# Altium PCB preamp_pcb.PcbDoc
Units mil, origin at the board's own origin, x right, y up, seen from the top; angles counter-clockwise.
Board outline 6000 x 4000 mil, 2 copper layers (Top Layer, Bottom Layer); 23 components, 17 nets, 72 pads, 0 vias.
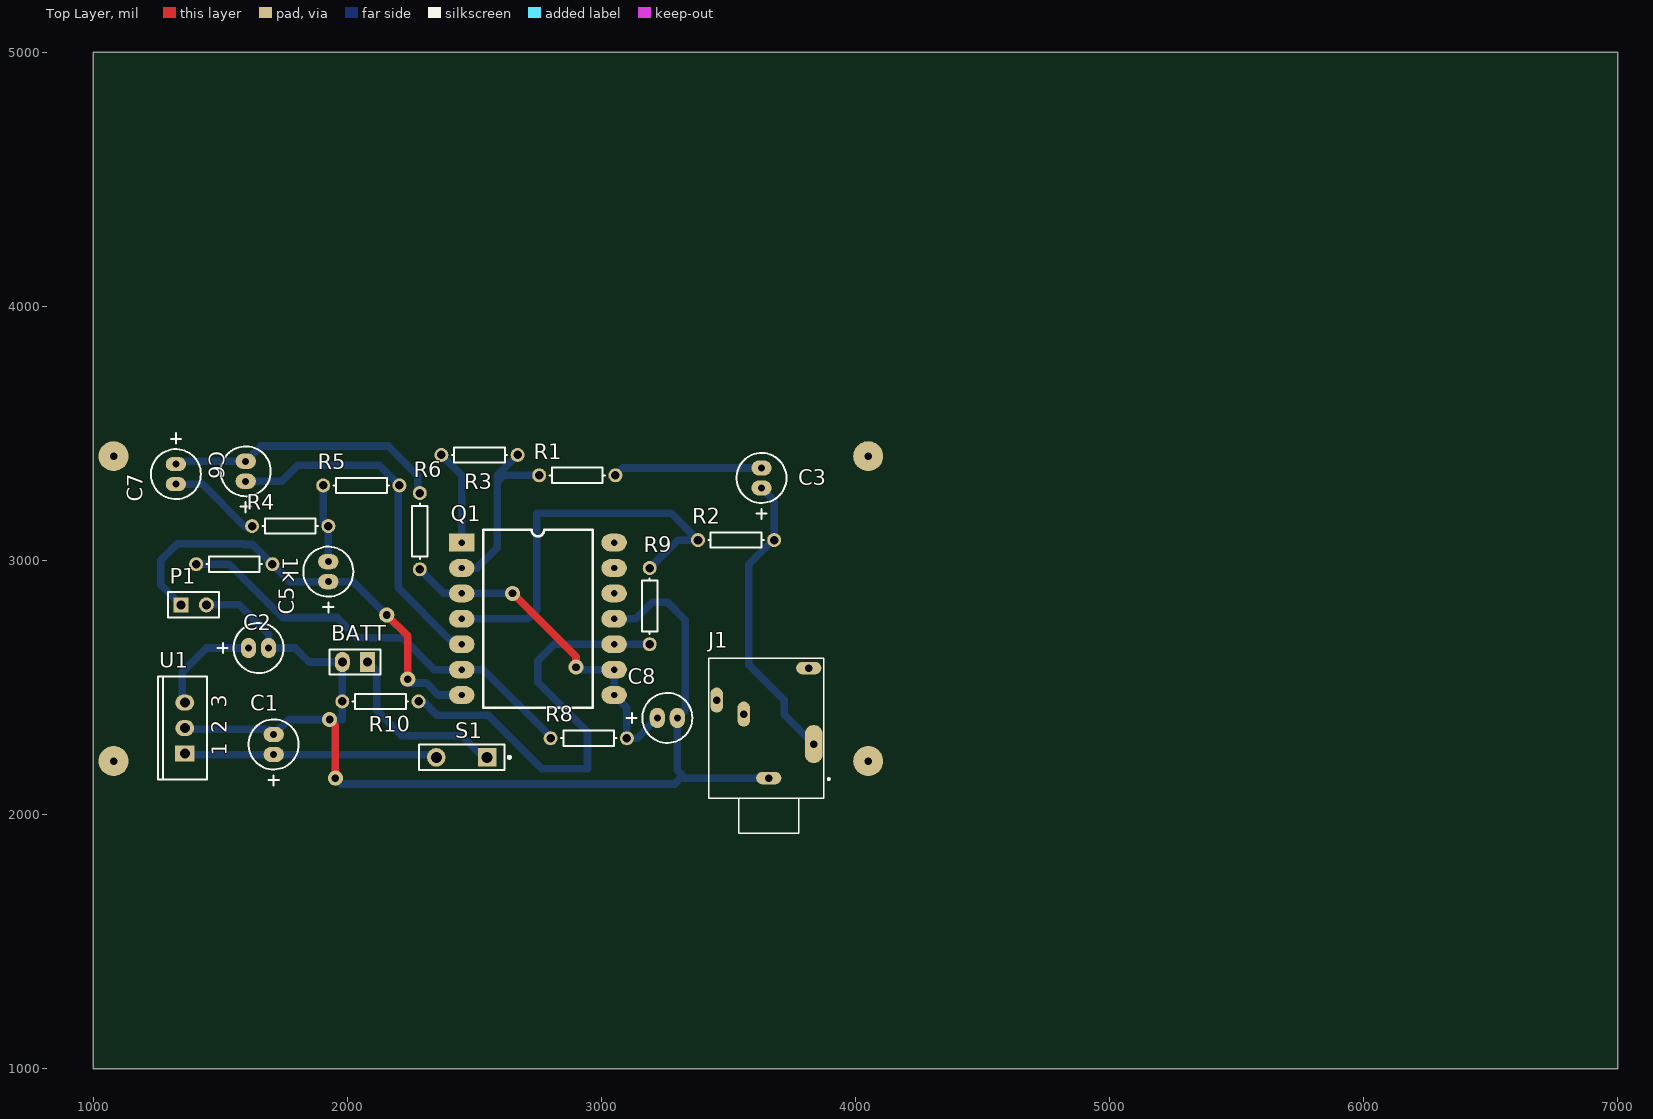
[diagram p0: Top Layer view]
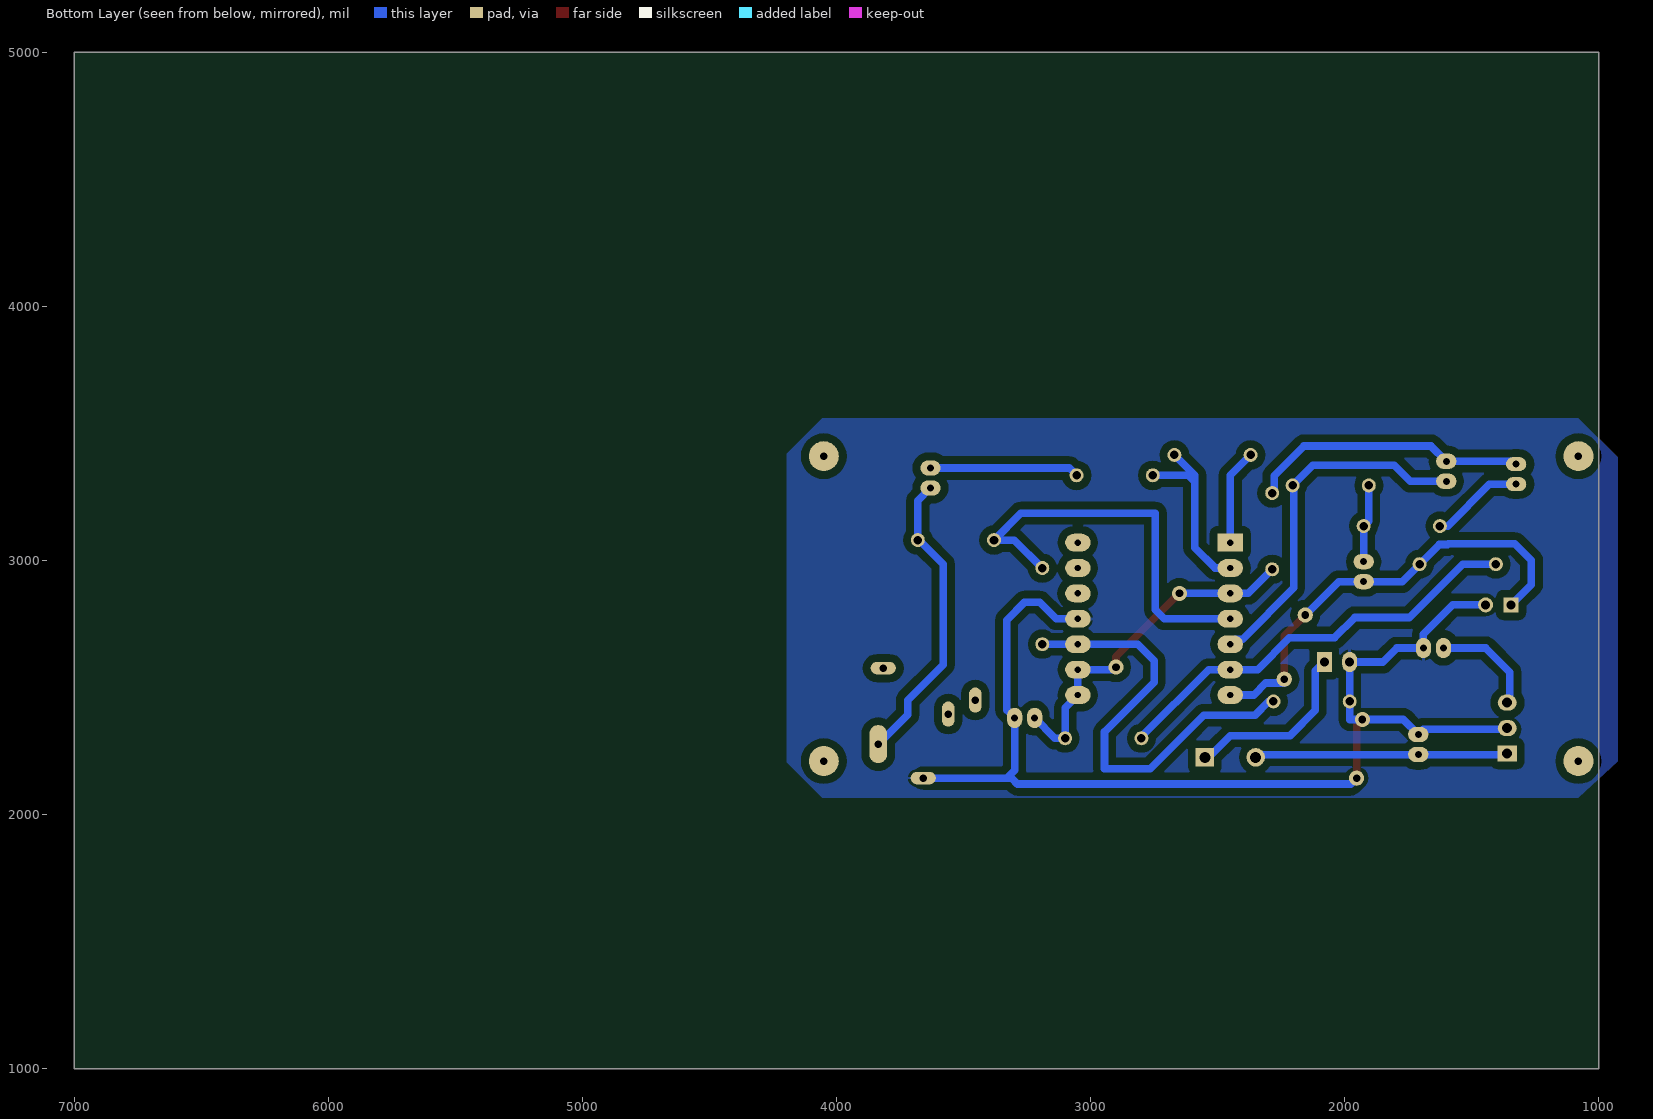
[diagram p1: Bottom Layer view, seen from below]

## Layer stack, top to bottom
Top Solder: solder mask 0.4, Solder Resist, Dk 3.5
Top Layer: signal copper 1.4
Dielectric 1: dielectric 12.6, FR-4, Dk 4.8
Bottom Layer: signal copper 1.4
Bottom Solder: solder mask 0.4, Solder Resist, Dk 3.5

## Board outline
1000,1000 7000,1000 7000,5000 1000,5000

## Design rules (kind name [scope] priority, off if disabled: settings)
Clearance [All] p1: gap=10 ignorepadtopadclearanceinfootprint=TRUE except(0: Arc-Hole Track-Hole SMDPad-Hole THPad-Hole Via-Hole Fill-Hole Poly-Hole Region-Hole Text-Hole; 20: Text-Text; 30: Arc-Arc Arc-Track Arc-THPad Arc-Fill Arc-Poly Arc-Region Arc-Text Track-Track Track-THPad Track-Fill Track-Poly Track-Region Track-Text THPad-THPad THPad-Fill THPad-Poly THPad-Region Fill-Text Poly-Text Region-Text)
PolygonConnect [All] p1: connectstyle=Relief reliefconductorwidth=10 reliefentries=4 polygonreliefangle="90 Angle" airgapwidth=10
RoomDefinition Power [InComponentClass('Power')] p1: confinementstyle=ConfineIn formatcopy=TRUE lockcomponents=FALSE outline 0,0 2000,0 2000,1000 0,1000
RoomDefinition preamplifier [InComponentClass('preamplifier')] p2: confinementstyle=ConfineIn formatcopy=TRUE lockcomponents=FALSE outline 850,2065 4395,2065 4395,3600 850,3600
RoutingVias [All] p1: holewidth=28 width=50 viastyle="Through Hole" minholewidth=28 minwidth=50 maxholewidth=28 maxwidth=50
SolderMaskExpansion [All] p1: expansion=4
Width [All] p1: maxlimit=40 minlimit=30 preferedwidth=30 minimp=50.000000 maximp=50.000000 favimp=50.000000
30 further rules are at their usual default settings.

## Classes and differential pairs
component class preamplifier: 1k C3 C5 C6 C7 C8 J1 P1 Q1 R1 R2 R3 R4 R5 R6 R8 R9 R10
component class Power: BATT C1 C2 S1 U1

## Components (designator, comment, footprint, x,y, rotation, side; value= is the part's Value field where it differs from the comment)
1k "" AXIAL-0.3 1555,2985 r0 top value=1K
BATT "BATT_Connector" HDR1X2#1 2080,2600 r180 top
C1 "Cap2" "Capacitor 5mmx11mm"#1 1710,2236.26 r90 top value=4.7u
C2 "Cap2" "Capacitor 5mmx11mm"#1 1611.26,2655 r0 top value=4.7u
C3 "" "Capacitor 5mmx11mm"#1 3630,3285 r90 top value=1uF
C5 "" "Capacitor 5mmx11mm"#1 1925,2916.26 r90 top value=2.2uF
C6 "" "Capacitor 5mmx11mm"#2 1325,3378.74 r270 top value=1uF
C7 "" "Capacitor 5mmx11mm"#1 1600,3311.26 r90 top value=1uF
C8 "" "Capacitor 5mmx11mm"#1 3220,2380 r0 top value=1uF
J1 "35RAPC4BH3" *SWITCHCRAFT_35RAPC4BH3 3648.58,2339.88 r90 top
P1 "Header 2" HDR1X2#2 1345,2825 r0 top
Q1 "LMP7704" SOIC-14_BREAKOUT 2450,3070 r0 top
R1 "" AXIAL-0.3 2905,3335 r180 top value=10k
R2 "" AXIAL-0.3 3530,3080 r180 top value=2.2k
R3 "" AXIAL-0.3 2520,3415 r180 top value=100k
R4 "" AXIAL-0.3 1775,3135 r0 top value=3.3k
R5 "" AXIAL-0.3 2055,3295 r0 top value=3.3k
R6 "" AXIAL-0.3 2285,3115 r90 top value=1.2K
R8 "" AXIAL-0.3 2950,2300 r0 top value=1.5k
R9 "" AXIAL-0.3 3190,2820 r90 top value=1K
R10 "" AXIAL-0.3 2130,2445 r0 top value=1K
S1 "SW-SPST" SPST-2 2450,2225 r180 top
U1 "MC7805CT" 221A-06 1360,2340 r90 top

## Footprints (in the part's own frame and the unit in brackets; to place one, negate y for a bottom-side part, rotate by r counter-clockwise, add the part's x,y. Pads: shape width x height; smd on the part's side, far side on the other; paste and mask are expansions set on the pad)
221A-06 [mm] "TO, Thru-Hole, Vertical, Heatsink Mounted; 3 In-Line Leads; Pitch 2.54 mm"
  rect 1.6x1.905 hole 1: 1(-2.54,0)
  oval 1.6x1.905 hole 1: 2(0,0) 3(2.54,0)
  silkscreen extent -5.15,-2.2 5.15,2.7
*SWITCHCRAFT_35RAPC4BH3 [mm]
  oval 1.258x2.516 hole 0.75: 1(-5,-0.25) 4(6,-4.25)
  oval 2.516x1.258 hole 0.75: 2(2.8,4.95) 3(1.4,2.25)
  oval 3.81x1.778 hole 0.75: 5(-1.6,-4.75)
  silkscreen extent -10.5,-6.35 7,5.75
AXIAL-0.3 [mm] "Axial Device, Thru-Hole; 2 Leads; 0.3 in Pin Spacing"
  round 1.4 hole 0.85: 1(-3.81,0) 2(3.81,0)
  silkscreen extent -2.77,-0.76 2.77,0.76
"Capacitor 5mmx11mm"#1 [mil]
  oval 60x80 hole 27.56: 1(0,0) 2(78.74,0)
  silkscreen extent -122,-98 138,98
"Capacitor 5mmx11mm"#2 [mil]
  oval 55x80 hole 27.56: 1(0,0) 2(78.74,0)
  silkscreen extent -122,-98 138,98
HDR1X2#1 [mm] "Connector; Header; 2 Position"
  rect 1.5x2.032 hole 0.9: 1(0,0)
  oval 1.5x2.032 hole 0.9: 2(2.54,0)
  silkscreen extent -1.27,-1.27 3.81,1.27
HDR1X2#2 [mm] "Connector; Header; 2 Position"
  rect 1.5x1.5 hole 0.9: 1(0,0)
  round 1.5 hole 0.9: 2(2.54,0)
  silkscreen extent -1.27,-1.27 3.81,1.27
SOIC-14_BREAKOUT [mil]
  rect 100x70 hole 25: 1(0,0)
  oval 100x70 hole 25: 2(0,-100) 3(0,-200) 4(0,-300) 5(0,-400) 6(0,-500) 7(0,-600) 8(600,-600) 9(600,-500) 10(600,-400) 11(600,-300) 12(600,-200) 13(600,-100) 14(600,0)
  silkscreen extent 85,-650 515,50
SPST-2 [mm] "Switch; 2 Leads"
  rect 1.85x1.85 hole 1.1: 1(-2.54,0)
  round 1.85 hole 1.1: 2(2.54,0)
  silkscreen extent -4.89,-1.27 4.28,1.27

## Part data
1k R1 R2 R3 R4 R5 R6 R8 R9 R10: library part Res1, "Resistor", LatestRevisionDate=17-Jul-2002, LatestRevisionNote="Re-released for DXP Platform.", PackageDescription="Axial Device, Thru-Hole; 2 Leads; 0.3 in Pin Spacing", PackageReference=AXIAL-0.3, Published=8-Jun-2000, Publisher="Altium Limited"
BATT: library part "Header 2", "Header, 2-Pin", LatestRevisionDate=17-Jul-2002, LatestRevisionNote="Re-released for DXP Platform.", Publisher="Altium Limited"
C1 C2: "Capacitor", PackageDescription="Capacitor; 2 Leads", PackageReference=CAPR5-4X5, Published=23-Sep-2002, Publisher="Altium Limited"
C3 C5 C6 C7 C8: library part "Cap Pol1", "Polarized Capacitor (Radial)", LatestRevisionDate=17-Jul-2002, LatestRevisionNote="Re-released for DXP Platform.", PackageDescription="Polarized Capacitor (Radial); 2 Leads", PackageReference=RB7.6-15, Published=8-Jun-2000, Publisher="Altium Limited"
J1: "3.50mm _0.141, 1/8, Mini Plug_ - Headphone Phone Jack Stereo _3 Conductor, TRS_ Connector Solder", Package=None, Availability=Unavailable, MF="Switchcraft Inc.", MP=35RAPC4BH3, Price=None, SnapEDA_Link=https://www.snapeda.com/parts/35RAPC4BH3/Switchcraft%20Inc./view-part/621325/?ref=snap
P1: "Header, 2-Pin", LatestRevisionDate=17-Jul-2002, LatestRevisionNote="Re-released for DXP Platform.", Publisher="Altium Limited"
S1: "Single-Pole, Single-Throw Switch", LatestRevisionDate=17-Jul-2002, LatestRevisionNote="Re-released for DXP Platform.", PackageDescription="Switch; 2 Leads", PackageReference=SPST-2, Published=24-Mar-1999, Publisher="Altium Limited"
U1: "Three-Terminal Positive Voltage Regulator", Code_JEDEC=TO-262-AA, ComponentLink1Description="Manufacturer Link", ComponentLink1URL=http://www.onsemi.com/site/products/taxonomy/0,4438,503,00.html, ComponentLink2Description=Datasheet, ComponentLink2URL=http://www.onsemi.com/pub/Collateral/MC7800-D.PDF, DatasheetVersion=1997, Note="Heatsink surface is connected to Pin 2", PackageDescription="TO, Thru-Hole, Vertical, Heatsink Mounted; 3 In-Line Leads; Pitch 2.54 mm", PackageReference=221A-06, PackageVersion=1997, Published=15-Apr-2002, Publisher="Altium Limited"

## Free pads (board coordinates)
  round 60 hole 30: 2(1953.03,2143.03) 3(1930,2373.74) 4(2155,2785) 5(2237.44,2532.56) 10(2650,2870) 11(2900,2580)
  round 118.11 hole 30: 12(1080,2210) 12(1080,3410) 12(4050,2210) 12(4050,3410)

## Nets (pads, with @x,y where several pads share a name; then routed paths per layer and width w, separated by ;. In a path a pad name is that pad's centre, name@x,y a point inside that pad or via, vN(x,y) a via of type N, cw(c..) or ccw(c..) an arc to the next point about the centre after c; other vN are vias at no path point)
GND: BATT.2 C1.2 C2.2 C8.2 J1.1 P1.2 pad.2 pad.3 Q1.11 R10.1 U1.2 | length 4497.6
  Top Layer w30: pad.3 1953.03,2350.71 pad.2
  Bottom Layer w30: U1.2@1350,2335 1690,2335 C1.2 1768.74,2373.74 pad.3 1980,2373.74 R10.1 BATT.2 1850,2600 1795,2655 C2.2 1690,2709.62 1574.62,2825 P1.2 ; pad.2 1976.06,2120 3287.61,2120 3310.65,2143.03 3330,2143.03 ; Q1.11 3135,2770 3200,2835 3260,2835 3330,2765 3330,2411.26 C8.2 3298.74,2174.29 3330,2143.03 ; J1.1 3330,2143.03
neg1: Q1.2 R1.2 R3.1 | length 746.6
  Bottom Layer w30: Q1.2 2510,2970 2590,3050 2590,3310 ; R3.1 2590,3335 2590,3310 ; R1.2 2615,3335 2590,3310
neg2: 1k.1 Q1.6 R8.1 | length 1676.7
  Bottom Layer w30: 1k.1 1535,2985 1745,2775 1960,2775 2040,2695 2217.47,2695 2342.47,2570 Q1.6 2535,2570 R8.1@2800,2305
neg3: C8.1 pad.10 pad.11 Q1.3 Q1.8 Q1.9 R6.1 R8.2 | length 1395.9
  Top Layer w30: pad.10 2900,2620 pad.11
  Bottom Layer w30: R6.1 2380,2870 Q1.3 pad.10 ; pad.11 2910,2570 Q1.9 Q1.8 3100,2420 R8.2 3140,2300 C8.1
NetBATT_1: BATT.1 S1.1 | length 716.1
  Bottom Layer w30: BATT.1 2115,2565 2115,2410 2215,2310 2450,2310 2535,2225 S1.1
NetC1_1: C1.1 S1.2 U1.1 | length 1004.1
  Bottom Layer w30: U1.1@1350,2235 2340,2235 S1.2
NetC3_1: C3.1 J1.5 R2.1 | length 1179
  Bottom Layer w30: C3.1 3680,3235 R2.1 3675,3080 3580,2985 3580,2590 3720,2450 3720,2392.48 J1.5
NetC3_2: C3.2 R1.1 | length 586.9
  Bottom Layer w30: R1.1 3083.74,3363.74 C3.2
NetC5_2: C5.2 R4.2 R5.1 | length 308.3
  Bottom Layer w30: R5.1 1905,3155 R4.2 C5.2
NetC6_1: C6.1 C7.2 R6.2 | length 1115.7
  Bottom Layer w30: C6.1@1314.88,3368.62 C6.1 1336.26,3390 C7.2 1660,3450 2160.19,3450 2277.56,3332.63 2277.56,3272.44 R6.2
NetC6_2: C6.2 R4.1 | length 368.3
  Bottom Layer w30: C6.2 1430,3300 1595,3135 R4.1
Output1: Q1.1 R3.2 | length 378.1
  Bottom Layer w30: R3.2 2450,3335 Q1.1
Output2: 1k.2 C5.1 P1.1 pad.4 pad.5 Q1.7 | length 1774.9
  Top Layer w30: pad.4 2237.44,2702.56 pad.5
  Bottom Layer w30: P1.1 1265,2905 1265,3000 1330,3065 1592.39,3065 1594.95,3062.44 1627.56,3062.44 1k.2 1773.74,2916.26 C5.1 2023.74,2916.26 pad.4 ; pad.5 2237.44,2517.56 2310.05,2517.56 2357.61,2470 Q1.7
pos2: C7.1 Q1.5 R5.2 | length 1411.6
  Bottom Layer w30: C7.1 1741.26,3311.26 1805,3375 2125,3375 R5.2 2200,3290 2200,2891.86 2401.86,2690 2430,2690 Q1.5
pos3: Q1.10 R9.1 R10.2 | length 1747.5
  Bottom Layer w30: R10.2 2297.76,2445 2352.76,2390 2555,2390 2765,2180 2945,2180 2945,2325 2750,2520 2750,2605 2815,2670 Q1.10 R9.1
Vcc: Q1.4 R2.2 R9.2 | length 1603.6
  Bottom Layer w30: Q1.4 2710,2770 2745,2805 2745,3185 3275,3185 R2.2 3300,3080 R9.2
VCC(+5V): C2.1 U1.3 | length 425.6
  Bottom Layer w30: U1.3@1350,2435 1350,2560 1445,2655 C2.1
pads on no net: J1.2 J1.3 J1.4 Q1.12 Q1.13 Q1.14

## Polygon pours and split planes (outlines as drawn)
GND on Bottom Layer "Bottom Layer-No Net" (solid, pour order 6): 1080,2065 4055,2065 4195,2205 4195,3420 4055,3560 1080,3560 925,3405 925,2210

## Text inside footprints (layer, text, board x,y; h text height)
U1: Top Overlay "1" at 1524.37,2230.16 h59.06 r90; Top Overlay "2" at 1524.37,2320.32 h59.06 r90; Top Overlay "3" at 1524.37,2420.32 h59.06 r90